# Altium PCB ESPSmartPlug.PcbDoc
Units mm, origin at the board's own origin, x right, y up, seen from the top; angles counter-clockwise.
Board outline 110 x 35 mm, 2 copper layers (Top Layer, Bottom Layer); 48 components, 37 nets, 163 pads, 0 vias.
Unrouted connection lines stored in the file: 96.
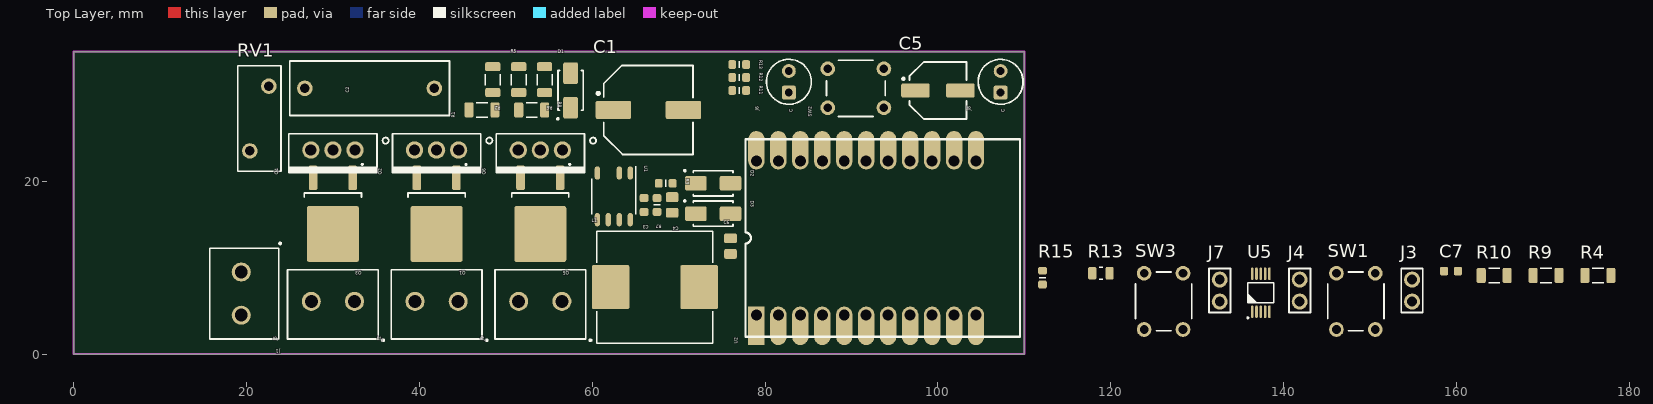
[diagram p0: Top Layer view]
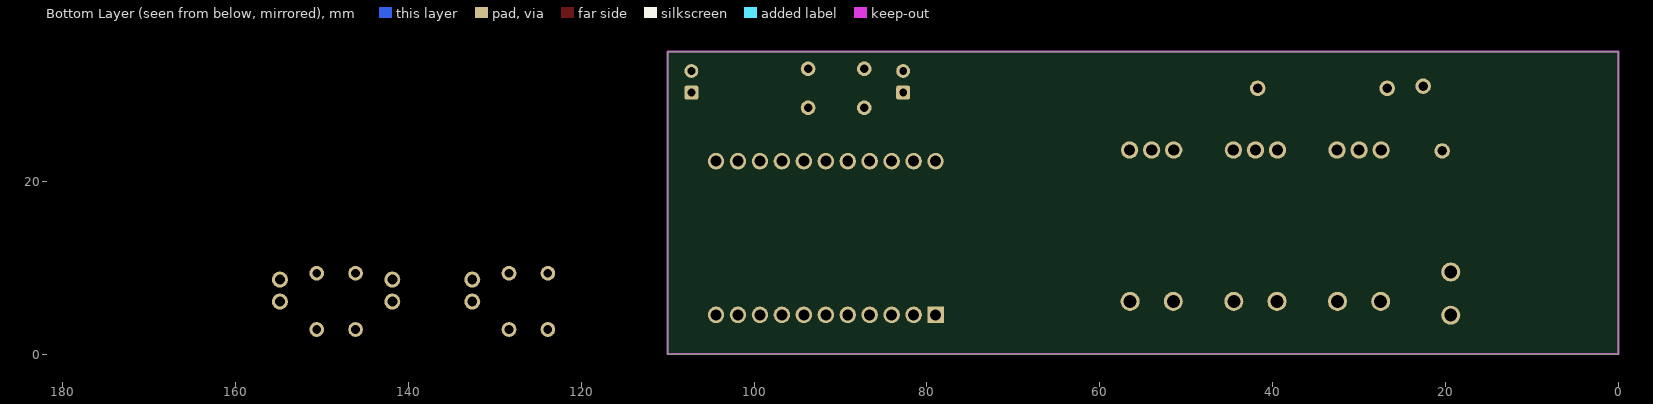
[diagram p1: Bottom Layer view, seen from below]

## Layer stack, top to bottom
Top Solder: solder mask 0.0102, Solder Resist, Dk 3.5
Top Layer: signal copper 0.0356
Dielectric 1: dielectric 0.32, FR-4, Dk 4.8
Bottom Layer: signal copper 0.0356
Bottom Solder: solder mask 0.0102, Solder Resist, Dk 3.5

## Board outline
0,0 110,0 110,35 0,35

## Design rules (kind name [scope] priority, off if disabled: settings)
Clearance [All] p1: gap=0.254
PolygonConnect [All] p1: connectstyle=Relief reliefconductorwidth=0.254 reliefentries=4 polygonreliefangle="90 Angle" airgapwidth=0.254
RoomDefinition ESPSmartPlug [InComponentClass('ESPSmartPlug')] p1 off: confinementstyle=ConfineIn formatcopy=TRUE lockcomponents=FALSE outline 153.543,1.651 411.48,1.651 411.48,36.449 153.543,36.449
RoutingVias [All] p1: holewidth=0.711 width=1.27 viastyle="Through Hole" minholewidth=0.711 minwidth=1.27 maxholewidth=0.711 maxwidth=1.27
SolderMaskExpansion [All] p1: expansion=0.102
UnpouredPolygon [All] p1: allowunpoured=FALSE
Width [All] p1: maxlimit=0.254 minlimit=0.254 preferedwidth=0.254
29 further rules are at their usual default settings.

## Components (designator, comment, footprint, x,y, rotation, side; value= is the part's Value field where it differs from the comment)
C1 "4.7uF" SMD_CAPAE1030X1050N 66.5,28.25 r0 top
C2 "47nF" PTH_CAPA1500-630X1850X1550 34.25,30.75 r180 top
C3 "100nF" SMD_0603_CAPC1608X95N 66,17.25 r270 top
C4 "22uF" SMD_0805_CAPC2012X95N 69.25,17.25 r270 top
C5 "100uF" SMD_CAPAE660X550N 100,30.5 r0 top
C6 "22uF" SMD_0805_CAPC2012X95N 76,12.5 r90 top
C7 "330pF" SMD_0603_CAPC1608X95N 159.35,9.6 r0 top
D1 "S1M" SMD_DO214AC_SMA 57.5,30.5 r90 top
D2 "S1M" SMD_DO214AC_SMA 74,19.75 r0 top
D3 "US1K" SMD_DO214AC_SMA 74,16.25 r0 top
J1 "CON_2PINS" PTH_HDRV02W11060P500_1X02 19.75,7 r270 top
J2 "CON_2PINS" PTH_HDRV02W11060P500_1X02 42,5.75 r180 top
J3 "JUMPER_1" PTH_HDRV02W64P254_1X02 154.85,7.35 r90 top
J4 "JUMPER_2" PTH_HDRV02W64P254_1X02 141.85,7.35 r90 top
J5 "CON_2PINS" PTH_HDRV02W11060P500_1X02 30,5.75 r180 top
J6 "LED WIFI" PTH_LED-KINGBRIGHT-L-934SGC 82.75,31.5 r90 top
J7 "JUMPER_3" PTH_HDRV02W64P254_1X02 132.6,7.35 r90 top
J8 "LED RESERVE" PTH_LED-KINGBRIGHT-L-934SGC 107.25,31.5 r90 top
J9 "CON_2PINS" PTH_HDRV02W11060P500_1X02 54,5.75 r180 top
L1 "680uH" SMT_INDM135130X800N 67.25,7.75 r0 top
Q1 "T405Q-600B" SMD_TO229P991X239-4N_DPAK 42,16.25 r270 top
Q2 "BT136-600D" PTH_TO220AB 42,23.25 r180 top
Q3 "T405Q-600B" SMD_TO229P991X239-4N_DPAK 30,16.25 r270 top
Q4 "BT136-600D" PTH_TO220AB 30,23.25 r180 top
Q5 "T405Q-600B" SMD_TO229P991X239-4N_DPAK 54,16.25 r270 top
Q6 "BT136-600D" PTH_TO220AB 54,23.25 r180 top
R1 "330R" SMD_1206_RESC3216X102N 47.25,28.25 r180 top
R2 "330R" SMD_1206_RESC3216X102N 48.5,31.75 r270 top
R3 "2.21k" SMD_0603_RESC1608X55N 68.5,19.75 r0 top
R4 "470k" SMD_1206_RESC3216X102N 176.35,9.1 r0 top
R5 "330R" SMD_1206_RESC3216X102N 51.5,31.75 r90 top
R6 "330R" SMD_1206_RESC3216X102N 54.5,31.75 r270 top
R7 "2.21k" SMD_0603_RESC1608X55N 67.5,17.25 r270 top
R8 "330R" SMD_1206_RESC3216X102N 53,28.25 r0 top
R9 "470k" SMD_1206_RESC3216X102N 170.35,9.1 r0 top
R10 "100k" SMD_1206_RESC3216X102N 164.35,9.1 r0 top
R11 "82R" SMD_0603_RESC1608X55N 77,30.5 r0 top
R12 "82R" SMD_0603_RESC1608X55N 77,32 r0 top
R13 "NTC NCP21XV103J03RA" SMD_0805_RESC2012X60N 118.85,9.35 r0 top
R13 "82R" SMD_0603_RESC1608X55N 77,33.5 r0 top
R15 "10k" SMD_0603_RESC1608X55N 112.1,8.85 r90 top
RV1 "S10K250 7.5mm" PTH_VAR_S10K275 21.5,27.25 r90 top
SW1 "BUTTON_1" PTH_SWI_TACT-64K_H1690 148.35,6.1 r0 top
SW2 "BUTTON_2" PTH_SWI_TACT-64K_H1690 90.5,30.75 r90 top
SW3 "BUTTON_3" PTH_SWI_TACT-64K_H1690 126.1,6.1 r0 top
U1 "LNK304DN" SMD_SOIC127P600X175-7N 62.5,18.25 r270 top
U2 "ESP8266_OLIMEX_DEV" PTH_DIP22_DOUBLE 79,2 r90 top
U5 "ADG704" SMD_SOP50P490X110-10N 137.35,7.1 r90 top

## Footprints (in the part's own frame and the unit in brackets; to place one, negate y for a bottom-side part, rotate by r counter-clockwise, add the part's x,y. Pads: shape width x height; smd on the part's side, far side on the other; paste and mask are expansions set on the pad)
PTH_CAPA1500-630X1850X1550 [mm]
  round 1.8 hole 1.1 mask+0.075: 1(-7.5,0) 2(7.5,0)
  silkscreen extent -9.25,-3.15 9.25,3.15, body extent -9.25,-3.15 9.25,3.15, height 15.5
PTH_DIP22_DOUBLE [mm]
  rect 4.445x1.905 smd: 1(1.27,0)
  rect 1.905x1.905 hole 1.27: 1(2.54,0)
  oval 4.445x1.905 smd: 2(1.27,-2.54) 3(1.27,-5.08) 4(1.27,-7.62) 5(1.27,-10.16) 6(1.27,-12.7) 7(1.27,-15.24) 8(1.27,-17.78) 9(1.27,-20.32) 10(1.27,-22.86) 11(1.27,-25.4) 12(21.59,-25.4) 13(21.59,-22.86) 14(21.59,-20.32) 15(21.59,-17.78) 16(21.59,-15.24) 17(21.59,-12.7) 18(21.59,-10.16) 19(21.59,-7.62) 20(21.59,-5.08) 21(21.59,-2.54) 22(21.59,0)
  round 1.905 hole 1.27: 2(2.54,-2.54) 3(2.54,-5.08) 4(2.54,-7.62) 5(2.54,-10.16) 6(2.54,-12.7) 7(2.54,-15.24) 8(2.54,-17.78) 9(2.54,-20.32) 10(2.54,-22.86) 11(2.54,-25.4) 12(20.32,-25.4) 13(20.32,-22.86) 14(20.32,-20.32) 15(20.32,-17.78) 16(20.32,-15.24) 17(20.32,-12.7) 18(20.32,-10.16) 19(20.32,-7.62) 20(20.32,-5.08) 21(20.32,-2.54) 22(20.32,0)
  silkscreen extent 0,-30.48 22.86,1.27
PTH_HDRV02W64P254_1X02 [mm]
  round 1.85 hole 1.15 mask+0.075: 1(-1.27,0) 2(1.27,0)
  silkscreen extent -2.55,-1.25 2.55,1.25, body extent -2.54,-1.25 2.54,1.25, height 8
PTH_HDRV02W11060P500_1X02 [mm]
  round 2.2 hole 1.5 mask+0.075: 1(-2.5,-0.35) 2(2.5,-0.35)
  silkscreen extent -6,-4 5.25,4.35, body extent -5.25,-4 5.25,4, height 11
PTH_LED-KINGBRIGHT-L-934SGC [mm]
  rrect25% 1.6x1.6 / inner round 1.6 / far side rrect25% 1.6x1.6 hole 0.9 mask+0.075: 1(-1.25,0)
  round 1.6 hole 0.9 mask+0.075: 2(1.25,0)
  silkscreen extent -2.6,-2.6 2.6,2.6, body extent -1.6,-1.6 1.6,1.6, height 5.9
PTH_SWI_TACT-64K_H1690 [mm]
  round 1.7 hole 1 mask+0.075: 1(-2.25,3.25) 2(-2.25,-3.25) 3(2.25,3.25) 4(2.25,-3.25)
  silkscreen extent -3.25,-3.4 3.25,3.4, body extent -3.1,-3.4 3.1,3.4, height 17.5
PTH_TO220AB [mm]
  round 2 hole 1.3 mask+0.075: 1(-2.55,-0.35) 2(0,-0.35) 3(2.55,-0.35)
  silkscreen extent -6.45,-2.25 5.1,2.25, body extent -5.12,-2.25 5.12,2.26, height 19.2
PTH_VAR_S10K275 [mm]
  round 1.8 hole 1.1 mask+0.075: 1(-3.75,1.1) 2(3.75,-1.1)
  silkscreen extent -6.1,-2.5 6.1,2.5, body extent -6,-2.5 6,2.5, height 14.5
SMD_0603_CAPC1608X95N [mm]
  rrect42% 0.95x1 smd mask+0.075: 1(-0.8,0) 2(0.8,0)
  body extent -0.8,-0.4 0.8,0.4, height 0.95
SMD_0603_RESC1608X55N [mm]
  rrect44% 0.9x1 smd mask+0.075: 1(-0.8,0) 2(0.8,0)
  silkscreen extent 0,-0.4 0,0.4, body extent -0.8,-0.4 0.8,0.4, height 0.55
SMD_0805_CAPC2012X95N [mm]
  rrect35% 1.15x1.45 smd mask+0.075: 1(-0.9,0) 2(0.9,0)
  body extent -1,-0.62 1,0.63, height 1.25
SMD_0805_RESC2012X60N [mm]
  rrect42% 0.95x1.45 smd mask+0.05: 1(-1,0) 2(1,0)
  silkscreen extent -0.2,-0.7 0.2,0.7, body extent -1,-0.6 1,0.6, height 0.6
SMD_1206_RESC3216X102N [mm]
  rrect38% 1.05x1.75 smd mask+0.075: 1(-1.5,0) 2(1.5,0)
  silkscreen extent -0.65,-0.85 0.65,0.85, body extent -1.6,-0.8 1.6,0.8, height 1.02
SMD_CAPAE660X550N [mm]
  rrect24% 3.3x1.65 smd mask+0.075: 1(-2.6,0) 2(2.6,0)
  silkscreen extent -4.12,-3.3 3.3,3.3, body extent -3.65,-3.3 3.65,3.3, height 5.5
SMD_CAPAE1030X1050N [mm]
  rrect19% 4.1x2.1 smd mask+0.075: 1(-4.05,0) 2(4.05,0)
  silkscreen extent -5.95,-5.15 5.15,5.15, body extent -5.7,-5.15 5.7,5.15, height 11
SMD_DO214AC_SMA [mm]
  rrect24% 2.5x1.7 smd mask+0.075: 1(-2,0) 2(2,0)
  silkscreen extent -3.46,-1.45 2.3,1.65, body extent -2.64,-1.39 2.64,1.4, height 2.29
SMD_SOIC127P600X175-7N [mm]
  oval 1.55x0.6 smd mask+0.075: 1(-2.7,1.905) 2(-2.7,0.635) 4(-2.7,-1.905) 5(2.7,-1.905) 6(2.7,-0.635) 7(2.7,0.635) 8(2.7,1.905)
  silkscreen extent -3.5,-2.55 2.05,2.55, body extent -3,-2.5 3,2.5, height 1.75
SMD_SOP50P490X110-10N [mm]
  oval 1.45x0.3 smd mask+0.05: 1(-2.2,1) 2(-2.2,0.5) 3(-2.2,0) 4(-2.2,-0.5) 5(-2.2,-1) 6(2.2,-1) 7(2.2,-0.5) 8(2.2,0) 9(2.2,0.5) 10(2.2,1)
  silkscreen extent -3.05,-1.5 1.15,1.65, body extent -2.45,-1.5 2.45,1.5, height 1.15
SMD_TO229P991X239-4N_DPAK [mm]
  rrect40% 2.85x1 smd mask+0.075: 1(-4.15,2.29) 3(-4.15,-2.29)
  rrect7% 6.45x6 smd paste-3.225 mask+0.075: 4(2.35,0)
  silkscreen extent -5.85,-3.3 -1.9,3.55, body extent -4.88,-3.27 4.88,3.27, height 2.38
SMT_INDM135130X800N [mm]
  rrect9% 4.35x5.1 smd mask+0.075: 1(-5.125,0) 2(5.125,0)
  silkscreen extent -6.73,-6.48 6.73,6.48, body extent -6.26,-6.25 6.26,6.25, height 8

## Part data
C1 C5: library part C_POL
C2: library part C, "47nF 310V"
C3 C4 C6 C7: library part C
D1 D2 D3: library part D
J3 J4 J6 J7 J8: library part CON_2PINS
L1: library part L
Q1 Q3 Q5: library part THYR_T11G3T24
Q2 Q4 Q6: library part THYR_T11T22G3
R1 R2 R3 R4 R5 R6 R7 R8 R9 R10 R11 R12 R13 R13 R15: library part R
RV1: library part VARISTOR
SW2 SW3: library part BUTTON_1
U1: library part IC_LNK302-306D_SO-8C
U2: library part MOD_ESP8266_OLIMEX
U5: library part IC_ADG704, "Analog Multiplexor 4-Channel"

## Nets (pads, with @x,y where several pads share a name; then routed paths per layer and width w, separated by ;. In a path a pad name is that pad's centre, name@x,y a point inside that pad or via, vN(x,y) a via of type N, cw(c..) or ccw(c..) an arc to the next point about the centre after c; other vN are vias at no path point)
3.3V: C5.1 C6.1 D2.2 L1.2 R15.1 U2.1 U5.5 U5.6
240VAC: C2.1 J1.1 J2.1 J5.1 J9.1 R1.2 RV1.1
BP: C3.1 U1.1
CURRENT: U5.7
D: C1.1 D1.1 U1.4
FB: R3.1 R7.1 U1.2
GATE1: Q1.3 Q2.3 R11.1
GATE2: Q3.3 Q4.3 R12.1
GATE3: Q5.3 Q6.3 R13.1@76.2,33.5
GND: C1.2 C2.2 C5.2 C6.2 C7.2 D3.2 J1.2 J3.2 J4.2 J6.2 J7.2 J8.2 Q1.1 Q2.1 Q3.1 Q4.1 Q5.1 Q6.1 R10.1 R13.2@119.85,9.35 RV1.2 SW1.1 SW1.2 SW2.1 SW2.2 SW3.1 SW3.2 U2.2 U5.3
GPIO0: J6.1 U2.21
GPIO2: J8.1 U2.20
GPIO4: R11.2 U2.22
GPIO5: R12.2 U2.11
GPIO12: J3.1 SW1.3 SW1.4 U2.16
GPIO13: J7.1 SW3.3 SW3.4 U2.18
GPIO14: J4.1 SW2.3 SW2.4 U2.17 U5.10
GPIO15: R13.2@77.8,33.5 U2.19
GPIO16: U2.15 U5.1
MEAS: U5.8
NetC4_1: C4.1 D2.1 R3.2
NetD1_2: D1.2 R6.1
NetR1_1: R1.1 R2.2 R4.2
NetR2_1: R2.1 R5.2
NetR4_1: R4.1 R9.2
NetR5_1: R5.1 R8.1
NetR6_2: R6.2 R8.2
PLUG1AC: J2.2 Q1.4 Q2.2
PLUG2AC: J5.2 Q3.4 Q4.2
PLUG3AC: J9.2 Q5.4 Q6.2
RXD: U2.4
S: C3.2 C4.2 D3.1 L1.1 R7.2 U1.5 U1.6 U1.7 U1.8
TEMP_AMBIENT: U5.4
TEMP_BOARD: R13.1@117.85,9.35 R15.2 U5.2
TXD: U2.3
VMEAS: C7.1 R9.1 R10.2 U2.12
VOLTAGE: U5.9
pads on no net: U2.5 U2.6 U2.7 U2.8 U2.9 U2.10 U2.13 U2.14

## Keep-outs
Keep-Out Layer:
  the board outline again, w0.254

## Text inside footprints (layer, text, board x,y; h text height)
C1: Mechanical 3 "+" at 61.779,29.979 h0.75
J1: Mechanical 3 "1" at 19.45,11.06 h0.4 r270
J2: Mechanical 3 "1" at 46.06,6.05 h0.4 r180
J3: Mechanical 3 "1" at 155.8,5.04 h0.5 r90
J4: Mechanical 3 "1" at 142.8,5.04 h0.5 r90
J5: Mechanical 3 "1" at 34.06,6.05 h0.4 r180
J6: Mechanical 3 "C" at 83.05,29.271 h0.4 r90; Top Overlay "C" at 83.2,27.957 h0.4 r90
J7: Mechanical 3 "1" at 133.55,5.04 h0.5 r90
J8: Mechanical 3 "C" at 107.55,29.271 h0.4 r90; Top Overlay "C" at 107.7,27.957 h0.4 r90
J9: Mechanical 3 "1" at 58.06,6.05 h0.4 r180